# Altium PCB FocPCB.PcbDoc
Units mil, origin at the board's own origin, x right, y up, seen from the top; angles counter-clockwise.
Board outline 2210.03 x 1105.03 mil, 2 copper layers (Component Side, Bottom Layer), stack 12.8 mil thick; 86 components, 70 nets, 336 pads, 121 vias.
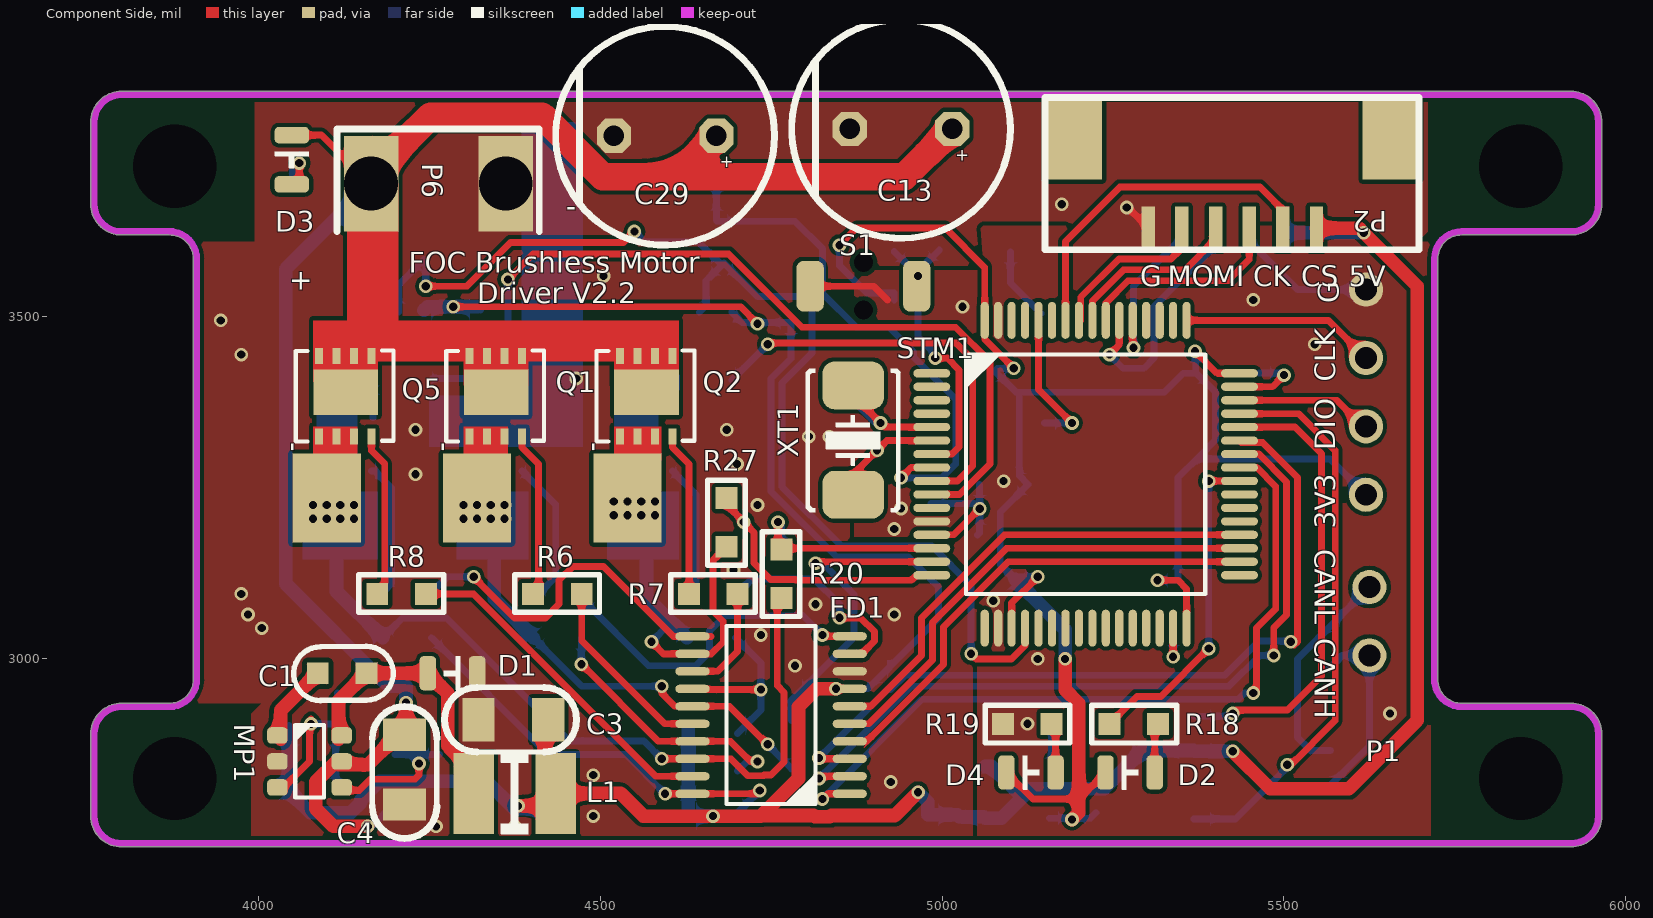
[diagram p0: Component Side view]
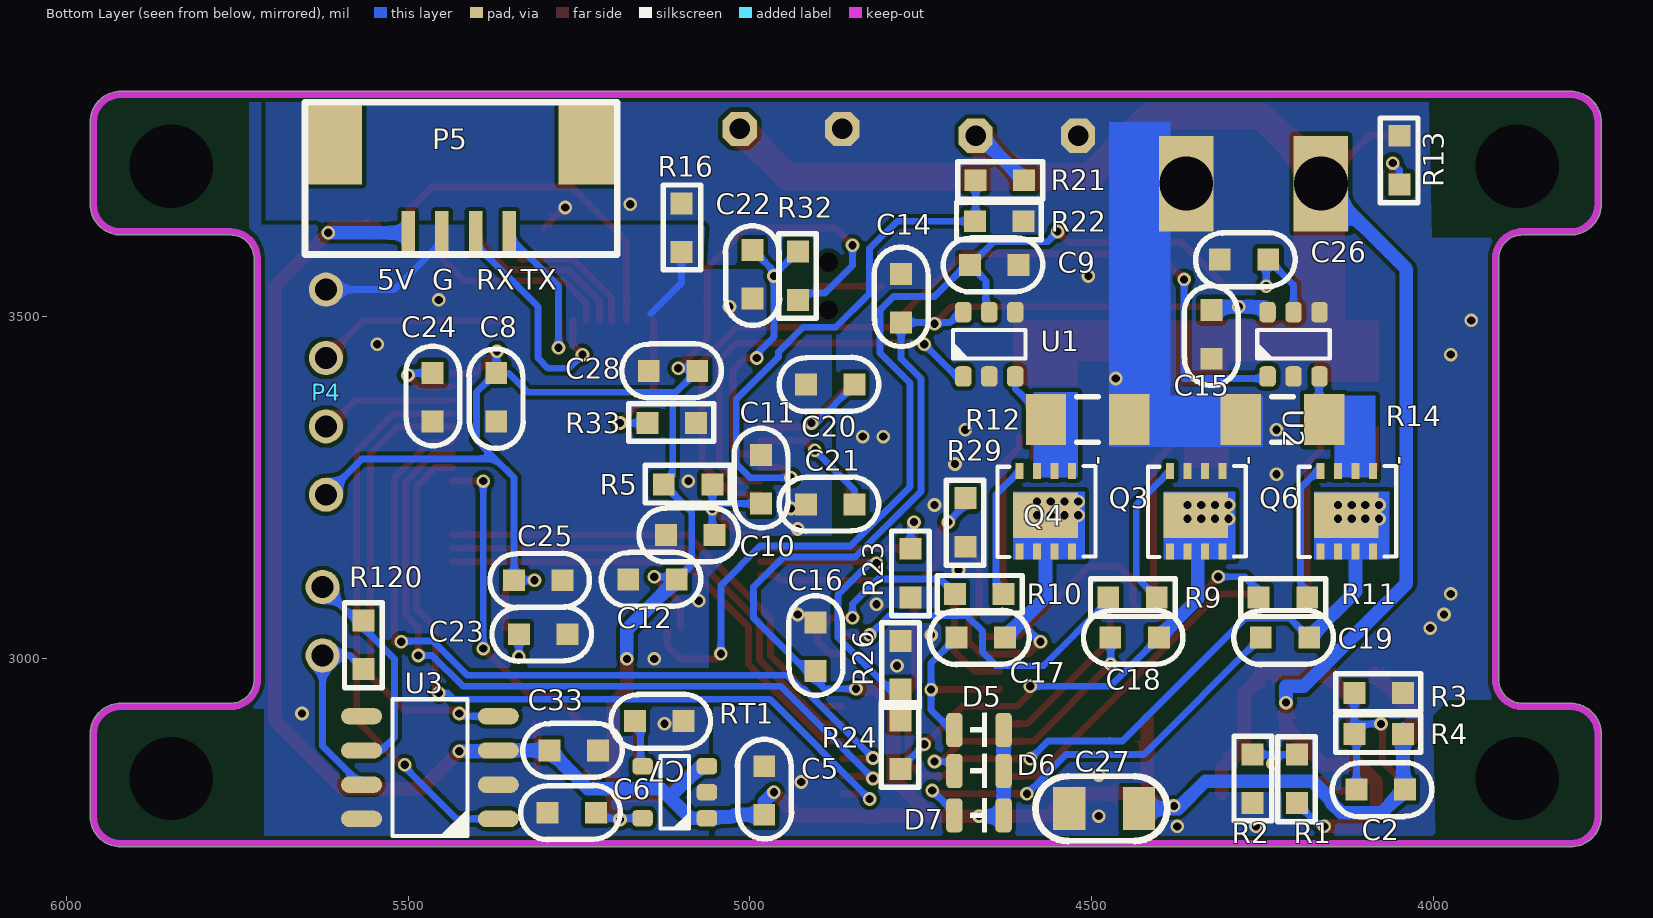
[diagram p1: Bottom Layer view, seen from below]
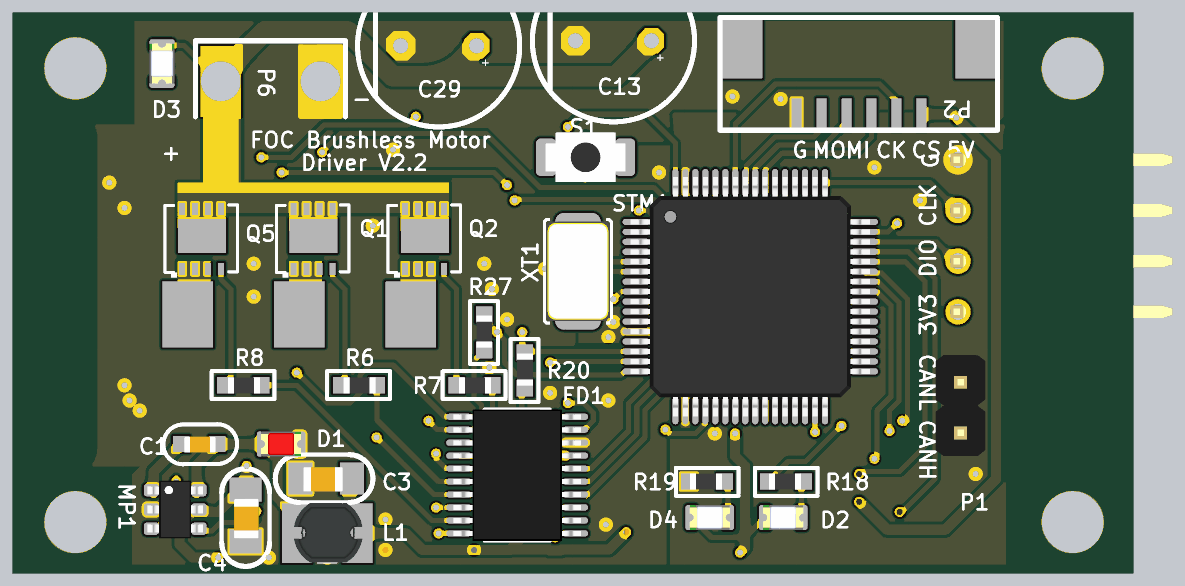
[diagram p2: 3D render of the assembled board from above, using the file's embedded part models]
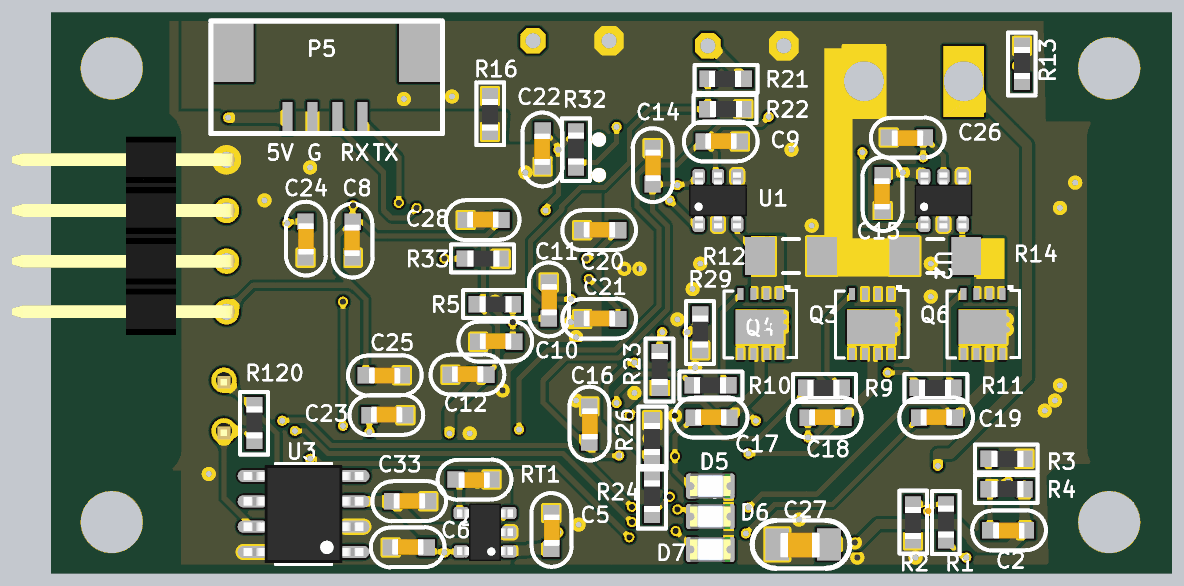
[diagram p3: 3D render of the assembled board from below, using the file's embedded part models]

## Layer stack, top to bottom
Top Solder: solder mask 0.4, Solder Resist, Dk 3.5
Component Side: signal copper 1.4
Dielectric 1: core 10, FR-4, Dk 4.2
Bottom Layer: signal copper 1.4
Solder Side: solder mask 0.4, Solder Resist, Dk 3.5

## Board outline
3799.97,2724.99 ccw(c3800,2770) 3800,2724.99 3800,2724.98 5710,2724.98 ccw(c5710,2730) 5710.03,2724.99 5920,2724.99 ccw(c5920,2770) 5965.02,2770 5965.02,2890 ccw(c5920,2890) 5920,2935.01 5760,2935.01 cw(c5760,2970) 5725.02,2970 5725.02,3585 cw(c5760,3585) 5760,3619.99 5920,3619.99 ccw(c5920,3665) 5965.02,3665 5965.02,3785 ccw(c5920,3785) 5920,3830.01 3800,3830.01 ccw(c3800,3785) 3754.99,3785 3754.99,3665 ccw(c3800,3665) 3800,3619.99 3870,3619.99 cw(c3870,3585) 3904.99,3585 3904.99,2970 cw(c3870,2970) 3870,2935.01 3800,2935.01 ccw(c3800,2890) 3754.99,2890 3754.99,2770 ccw(c3800,2770)

## Design rules (kind name [scope] priority, off if disabled: settings)
Clearance [All] p1: gap=6 ignorepadtopadclearanceinfootprint=FALSE
PlaneConnect [All] p1: planeconnectstyle=Direct reliefexpansion=20 reliefentries=4 reliefconductorwidth=10 reliefairgap=10
PolygonConnect [All] p1: connectstyle=Direct reliefconductorwidth=10 reliefentries=4 polygonreliefangle="90 Angle" airgapwidth=10
RoutingVias [All] p1: holewidth=28 width=50 viastyle="Through Hole" minholewidth=28 minwidth=50 maxholewidth=28 maxwidth=50
SolderMaskExpansion [All] p1: expansion=4
Width [All] p1: maxlimit=100 minlimit=10 preferedwidth=10 minimp=50.000000 maximp=50.000000 favimp=50.000000
29 further rules are at their usual default settings.

## Classes and differential pairs
component class Power: C1 C2 C3 C4 C5 C6 C7 C8 C12 C13 C25 C27 C28 C29 D1 D3 L1 MP1 P6 R1 R2 R3 R4 R13 R16 R21 R22 RT1
component class H_Bridge: C9 C14 C15 C16 C17 C18 C19 C26 D5 D6 D7 FD1 Q1 Q2 Q3 Q4 Q5 Q6 R6 R7 R8 R9 R10 R11 R12 R14 R20 R23 R24 R26 R27 R29 U1 U2
component class MCU: C10 C11 C20 C21 C22 C23 C24 C33 D2 D4 P1 P2 P4 P5 R5 R18 R19 R32 R33 R120 S1 STM1 U3 XT1

## Components (designator, comment, footprint, x,y, rotation, side; value= is the part's Value field where it differs from the comment)
C1 "Cap_0603" CAP_0603 4125,2980 r180 top value=0.1u
C2 "Cap_0603" CAP_0603 4075,2810 r0 bottom value=33pF
C3 "Cap_0805" CAP_0805 4370,2910 r0 top value=10u
C4 "Cap_0805" CAP_0805 4215,2835 r90 top value=10u
C5 "Cap_0603" CAP_0603 4980,2810 r270 bottom value=1u
C6 "Cap_0603" CAP_0603 5263,2774 r180 bottom value=0.1u
C7 "Cap_0603" CAP_0603 5130,2910 r0 bottom value=22n
C8 "Cap_0603" CAP_0603 5370,3380 r90 bottom value=0.1u
C9 "Cap_0603" CAP_0603 4645,3575 r180 bottom value=0.1u
C10 "Cap_0603" CAP_0603 5090,3180 r180 bottom value=0.1u
C11 "Cap_0603" CAP_0603 4985,3265 r270 bottom value=0.1u
C12 "Cap_0603" CAP_0603 5145,3115 r180 bottom value=0.1u
C13 "*μF" CAP-ELE-PIN150/DIA320 5015,3775 r180 top
C14 "Cap_0603" CAP_0603 4780,3530 r270 bottom value=0.1u
C15 "Cap_0603" CAP_0603 4324,3472 r90 bottom value=0.1u
C16 "Cap_0603" CAP_0603 4905,3020 r270 bottom value=0.1u
C17 "Cap_0603" CAP_0603 4665,3030 r180 bottom value=1u
C18 "Cap_0603" CAP_0603 4440,3030 r180 bottom value=1u
C19 "Cap_0603" CAP_0603 4220,3030 r180 bottom value=1u
C20 "Cap_0603" CAP_0603 4885,3400 r180 bottom value=20pf
C21 "Cap_0603" CAP_0603 4885,3225 r180 bottom value=20pf
C22 "Cap_0603" CAP_0603 4995,3560 r90 bottom value=0.1u
C23 "Cap_0603" CAP_0603 5305,3035 r180 bottom value=0.1u
C24 "Cap_0603" CAP_0603 5465,3385 r270 bottom value=0.1u
C25 "Cap_0603" CAP_0603 5307,3116 r0 bottom value=0.1u
C26 "Cap_0603" CAP_0603 4275,3585 r0 bottom value=0.1u
C27 "Cap_0805" CAP_0805 4485,2780 r180 bottom value=10u
C28 "Cap_0603" CAP_0603 5115,3420 r180 bottom value=0.1u
C29 "*μF" CAP-ELE-PIN150/DIA320 4670,3765 r180 top
C33 "Cap_0603" CAP_0603 5260,2865 r180 bottom value=0.1u
D1 "Diode" LED_0805_RED 4283.5,2979.5 r0 top
D2 "D_0805" LED_0805_YELLOW 5275,2835 r180 top
D3 "D_0805" LED_0805_YELLOW 4050,3730 r90 top
D4 "D_0805" LED_0805_YELLOW 5130,2835 r180 top
D5 "D_0805" LED_0805_YELLOW 4665,2895 r180 bottom
D6 "D_0805" LED_0805_YELLOW 4665,2835 r180 bottom
D7 "D_0805" LED_0805_YELLOW 4665,2770 r180 bottom
FD1 "FD6288" TSSOP_E170_P0.65_20 4750,2917.8 r180 top
L1 "Ind_CD32" IND_CD52 4375,2810 r0 top value=10uH
MP1 "MP2451" SOT23-6 4075,2850 r180 top
P1 "HDR1x2_2.54" HDR1X2_2.54_180 5625,3005 r180 top
P2 "HDR1x6_2.54" 1.25mm_1X6_SMT 5398.43,3625 r0 top
P4 "HDR1x4_2.54" HDR1X4_2.54_90 5620,3240 r0 bottom
P5 "HDR1x4_2.54" 1.25X4_SMT 5390,3690 r180 bottom
P6 "Header 2" power 4165,3695 r0 top
Q1 "DFN_MOS" DFN3X3X8 4411.82,3411 r90 top
Q2 "DFN_MOS" DFN3X3X8 4631.82,3411 r90 top
Q3 "DFN_MOS" DFN3X3X8 4411.82,3189 r270 bottom
Q4 "DFN_MOS" DFN3X3X8 4631.82,3189 r270 bottom
Q5 "DFN_MOS" DFN3X3X8 4191.82,3411 r90 top
Q6 "DFN_MOS" DFN3X3X8 4191.82,3189 r270 bottom
R1 "Res_0603" RES_0603 4282,2826 r90 bottom value=20K
R2 "Res_0603" RES_0603 4183,2823 r270 bottom value=10K
R3 "Res_0603" RES_0603 4079,3032 r180 bottom value=56K
R4 "Res_0603" RES_0603 4079,2972 r180 bottom value=300K
R5 "Res_0603" RES_0603 5089,3337 r180 bottom value=0R
R6 "Res_0603" RES_0603 4439,3177 r0 top value=10R
R7 "Res_0603" RES_0603 4667,3177 r0 top value=10R
R8 "Res_0603" RES_0603 4211,3177 r0 top value=10R
R9 "Res_0603" RES_0603 4442,3008 r0 bottom value=10R
R10 "Res_0603" RES_0603 4666,3013 r0 bottom value=10R
R11 "Res_0603" RES_0603 4222,3008 r0 bottom value=10R
R12 "Res1" RES-1206 4445,3350 r0 bottom value=0.003R
R13 "Res_0603" RES_0603 4132,3731 r90 bottom value=10K
R14 "Res1" RES-1206 4282.05,3350 r180 bottom value=0.003R
R16 "Res_0603" RES_0603 5018,3629 r270 bottom value=0R
R18 "Res_0603" RES_0603 5279,2823 r180 top value=10K
R19 "Res_0603" RES_0603 5123,2823 r180 top value=10K
R20 "Res_0603" RES_0603 4683,3126 r90 top value=100K
R21 "Res_0603" RES_0603 4636,3618 r0 bottom value=100K
R22 "Res_0603" RES_0603 4634,3722 r180 bottom value=10K
R23 "Res_0603" RES_0603 4847,3127 r90 bottom value=10K
R24 "Res_0603" RES_0603 4862,2876 r90 bottom value=100K
R26 "Res_0603" RES_0603 4698,2989 r270 bottom value=10K
R27 "Res_0603" RES_0603 4603,3201 r90 top value=100K
R29 "Res_0603" RES_0603 4767,3201 r90 bottom value=10K
R32 "Res_0603" RES_0603 5012,3562 r90 bottom value=10K
R33 "Res_0603" RES_0603 5113,3427 r180 bottom value=10K
R120 "Res_0603" RES_0603 5647,3022 r90 bottom value=120R
RT1 "RT9193" SOT23-5 5110,2805 r180 bottom
S1 "ButtonTACT_3x4x2_180" ButtonTACT_3x4x2_180H 4885,3545 r180 top
STM1 "STM32F4" LQFP_P0.5_64 5210,3270 r0 top
U1 "INA181" SOT23-6 4650,3460 r270 bottom
U2 "INA181" SOT23-6 4205,3460 r270 bottom
U3 "TJA1050" SOP_E150_8 5470,2845 r90 bottom
XT1 "XTAL_5032_2P" XT_5032_2 4870,3320 r90 top value=8M

## Footprints (in the part's own frame and the unit in brackets; to place one, negate y for a bottom-side part, rotate by r counter-clockwise, add the part's x,y. Pads: shape width x height; smd on the part's side, far side on the other; paste and mask are expansions set on the pad)
1.25mm_1X6_SMT [mm]
  rect 2.1x3 smd: 0(-5.225,3.425) 0(6.55,3.425)
  rect 0.5x1.6 smd: 1(-2.46,0.127) 2(-1.21,0.127) 3(0.04,0.127) 4(1.29,0.127) 5(2.54,0.127) 6(3.79,0.127)
  silkscreen extent -6.3,-0.67 7.6,4.97
1.25X4_SMT [mm]
  rect 2.1x3 smd: 0(-5.55,1.6) 0(3.85,1.6)
  rect 0.5x1.6 smd: 1(-2.785,-1.698) 2(-1.535,-1.698) 3(-0.285,-1.698) 4(0.965,-1.698)
  silkscreen extent -6.62,-2.5 4.97,3.15
ButtonTACT_3x4x2_180H [mil]
  round 0 hole 28: 0(0,35) 0(0,-35)
  rrect50% 40x74 smd: 1(-78,0) 2(78,0)
  body extent -79,-49 79,49, height 63
CAP-ELE-PIN150/DIA320 [mil]
  oct 50x50 hole 30: 1(0,0) 2(150,0)
  silkscreen extent -85,-160 235,160
CAP_0603 [mil]
  rect 32x32 smd: 1(-33,1) 2(38,1)
  silkscreen extent -72,-38 73,41, body extent -30,-14 33,18, height 31
CAP_0805 [mil]
  rect 47.24x62.99 smd: 1(-48,1) 2(54,1)
  silkscreen extent -98,-46 95,48, body extent -42,-25 36,24, height 39
DFN3X3X8 [mm]
  rect 0.6x0.3 smd: 1(-2.184,2.616) 2(-2.184,1.966) 3(-2.184,1.316) 4(-2.184,0.666) 5(0.816,0.666) 6(0.816,1.316) 7(0.816,1.966) 8(0.816,2.616)
  rect 1.7x2.4 smd: 5(-0.533,1.626)
  silkscreen extent -2.36,-0.15 1.02,3.48
HDR1X2_2.54_180 [mil]
  round 50 hole 32: 1(0,0) 2(0,-100)
  body extent -49,-150 49,50, height 323
HDR1X4_2.54_90 [mil]
  round 50 hole 32: 1(0,0) 2(0,-100) 3(0,-200) 4(0,-300)
  body extent -15,-346 424,46, height 99
IND_CD52 [mil]
  rect 59.06x118.11 smd: 1(-60,-7) 2(60,-7)
  silkscreen extent -20,-66 20,54, body extent -66,-65 70,53, height 83
LED_0805_RED [mil]
  rrect50% 24x50 smd: 1(36.5,-0.5) 2(-35.5,-0.5)
  silkscreen extent -12,-25 12,24, body extent -39,-25 40,24, height 43
LED_0805_YELLOW [mil]
  rrect50% 24x50 smd: 1(36,1) 2(-36,1)
  silkscreen extent -12,-24 12,26, body extent -40,-24 40,26, height 43
LQFP_P0.5_64 [mil]
  oval 54x12 smd: 1(-225,147.64) 2(-225,127.95) 3(-225,108.27) 4(-225,88.58) 5(-225,68.9) 6(-225,49.21) 7(-225,29.53) 8(-225,9.84) 9(-225,-9.84) 10(-225,-29.53) 11(-225,-49.21) 12(-225,-68.9) 13(-225,-88.58) 14(-225,-108.27) 15(-225,-127.95) 16(-225,-147.64) 33(225,-147.64) 34(225,-127.95) 35(225,-108.27) 36(225,-88.58) 37(225,-68.9) 38(225,-49.21) 39(225,-29.53) 40(225,-9.84) 41(225,9.84) 42(225,29.53) 43(225,49.21) 44(225,68.9) 45(225,88.58) 46(225,108.27) 47(225,127.95) 48(225,147.64)
  oval 12x54 smd: 17(-147.64,-225) 18(-127.95,-225) 19(-108.27,-225) 20(-88.58,-225) 21(-68.9,-225) 22(-49.21,-225) 23(-29.53,-225) 24(-9.84,-225) 25(9.84,-225) 26(29.53,-225) 27(49.21,-225) 28(68.9,-225) 29(88.58,-225) 30(108.27,-225) 31(127.95,-225) 32(147.64,-225) 49(147.64,225) 50(127.95,225) 51(108.27,225) 52(88.58,225) 53(68.9,225) 54(49.21,225) 55(29.53,225) 56(9.84,225) 57(-9.84,225) 58(-29.53,225) 59(-49.21,225) 60(-68.9,225) 61(-88.58,225) 62(-108.27,225) 63(-127.95,225) 64(-147.64,225)
  silkscreen extent -175,-175 175,175, body extent -236,-236 236,236, height 59
power [mil]
  rect 80x140 hole 78.74: 1(0,0) 2(196.85,0)
  silkscreen extent -50,-70 246,80
RES-1206 [mm]
  rect 1.5x1.9 smd: 1(0,0) 2(3.1,0)
  silkscreen extent 1.15,-0.85 1.95,0.85, body extent -0.13,-0.87 3.22,0.87, height 0.71
RES_0603 [mil]
  rect 32x32 smd: 1(-37,-82) 2(34,-82)
  silkscreen extent -64,-109 60,-54, body extent -31,-98 31,-66, height 18
SOP_E150_8 [mil]
  oval 24x60 smd: 1(-79,-102) 2(-29,-102) 3(21,-102) 4(71,-102) 5(71,98) 6(21,98) 7(-29,98) 8(-79,98)
  silkscreen extent -104,-57 96,53, body extent -100,-120 92,116, height 69
SOT23-5 [mil]
  rrect50% 30x24 smd: 1(47,-38) 2(47,0) 3(47,38) 4(-47,38) 5(-47,-38)
  silkscreen extent -21,-53 21,53, body extent -55,-57 55,57, height 57
SOT23-6 [mil]
  rrect50% 30x24 smd: 1(47,-38) 2(47,0) 3(47,38) 4(-47,38) 5(-47,0) 6(-47,-38)
  silkscreen extent -21,-53 21,53, body extent -55,-57 55,57, height 57
TSSOP_E170_P0.65_20 [mil]
  oval 50x12 smd: 1(-115,115.16) 2(-115,89.57) 3(-115,63.98) 4(-115,38.39) 5(-115,12.8) 6(-115,-12.8) 7(-115,-38.39) 8(-115,-63.98) 9(-115,-89.57) 10(-115,-115.16) 11(115,-115.16) 12(115,-89.57) 13(115,-63.98) 14(115,-38.39) 15(115,-12.8) 16(115,12.8) 17(115,38.39) 18(115,63.98) 19(115,89.57) 20(115,115.16)
  silkscreen extent -65,-130 65,130, body extent -126,-130 126,130, height 42
XT_5032_2 [mil]
  rrect50% 70x90 smd: 1(-80,0) 2(80,0)
  silkscreen extent -104,-68 104,68, body extent -98,-63 98,63, height 39

## Part data
C1 C2 C3 C4 C5 C6 C7 C8 C9 C10 C11 C12 C14 C15 C16 C17 C18 C19 C20 C21 C22 C23 C24 C25 C26 C27 C28 C33: "Capacitor"
C13 C29: library part CAP-ELE, "电解电容", LatestRevisionDate=17-Jul-2002, LatestRevisionNote="Re-released for DXP Platform.", PackageDescription="Polarized Capacitor (Radial); 2 Leads", PackageReference=RB7.6-15, Published=8-Jun-2000, Publisher="Altium Limited"
L1: "Inductor"
P1 P4 P5: "Header"
P2: library part HDR1x6_2.54T, "Header"
P6: "Header, 2-Pin", LatestRevisionDate=17-Jul-2002, LatestRevisionNote="Re-released for DXP Platform.", Publisher="Altium Limited"
R1 R2 R3 R4 R5 R6 R7 R8 R9 R10 R11 R12 R13 R14 R16 R18 R19 R20 R21 R22 R23 R24 R26 R27 R29 R32 R33 R120: "Resistor"
  R12 R14: LatestRevisionDate=17-Jul-2002, LatestRevisionNote="Re-released for DXP Platform.", PackageReference=AXIAL-0.3, Published=8-Jun-2000, Publisher="Altium Limited"
RT1: "Power"
S1: "Button"
STM1: library part STM32F405R, "MCU"
XT1: "Crystal Oscillator"

## Free pads (board coordinates)
  round 30 hole 122.05: 3(3877.95,2825) 3(3877.95,3720.63) 3(5846.46,2825) 3(5846.46,3720.63)
  rect 100x130 smd: 4(4099.91,3235) 4(4319.91,3235) 4(4539.91,3235)

## Via types
v1: diameter 20, hole 12, Component Side to Bottom Layer, 121 vias

## Nets (pads, with @x,y where several pads share a name; then routed paths per layer and width w, separated by ;. In a path a pad name is that pad's centre, name@x,y a point inside that pad or via, vN(x,y) a via of type N, cw(c..) or ccw(c..) an arc to the next point about the centre after c; other vN are vias at no path point)
3V3: C6.2 C8.2 C12.2 C25.2 C28.2 D2.1 D4.1 P4.1 R5.1 R32.1 RT1.5 STM1.19 STM1.32 STM1.48 STM1.64 | length 2818.1
  Component Side w10: v1(4850,3605) 4875,3630 5005,3630 5062.36,3572.64 STM1.64 5062.36,3467.64 v1(5105,3425) ; D4.1 5133,2795 5200,2795 D2.1 ; STM1.19 5101.73,3081.73 v1(5140,3120) ; v1(5315,3115) 5345,3115 5357.64,3102.36 STM1.32 ; v1(5370,3450) 5402.36,3417.64 STM1.48
  Component Side w20: v1(5180,3000) 5180,2955 5200,2935 5200,2795 5200,2775 v1(5190,2765)
  Bottom Layer w10: v1(4850,3605) 4850,3575 4890,3535 4930,3535 R32.1 ; v1(5105,3425) 5081,3425 C28.2 5108,3390 5325,3390 5352.64,3417.64 5372.36,3417.64 5400,3390 5400,3320 5372.5,3292.5 ; 5113,3385 5113,3268 R5.1 5085,3214 5085,3138 C12.2 5111,3120 v1(5140,3120) ; RT1.5 5217,2767 C6.2 ; v1(5315,3115) C25.2 5345,3265 5372.5,3292.5 ; v1(5370,3450) 5371,3449 C8.2 ; P4.1 5567.5,3292.5 5372.5,3292.5
  Bottom Layer w20: C12.2 5180,3043 v1(5180,3000)
5V: C2.1 C3.2 C5.2 C14.2 C15.2 C16.2 C27.2 C33.1 D5.1 D6.1 D7.1 FD1.7 L1.2 P2.6 P5.1 R4.2 RT1.1 RT1.3 U1.6 U2.6 U3.3 | length 4979.8
  Component Side w10: v1(4285,3515) 4705,3515 v1(4730,3490) ; v1(4845,2956.18) FD1.7
  Component Side w20: v1(4380,2785) 4417,2785 L1.2 4530.23,2803 4563.23,2770 v1(4665,2770) 4735,2770 4736,2771 ; L1.2@4419,2819 C3.2@4419,2911 ; v1(4845,2956.18) 4816.18,2956.18 4790,2930 4790,2825 4736,2771 ; v1(4965,2805) 4931,2771 4837.77,2771 4835.77,2769 4814.23,2769 4812.23,2771 4736,2771 ; v1(5425,2865) 5480,2810 5595,2810 5695,2910 5695,3545 v1(5616.85,3623.15) 5610,3630 P2.6
  Bottom Layer w10: R4.2 R4.2@4045,2902.44 ; C15.2@4320,3515 C15.2 ; U1.6@4692.4,3507.32 4707.72,3492 C14.2 4779,3439 4750,3410 4750,3245 4846,3149 4951,3149 4995,3105 4995,3060 4891.18,2956.18 v1(4845,2956.18)
  Bottom Layer w20: C2.1 4076,2775 4135,2775 4150,2790 4150,2793.63 4177.37,2821 4222.63,2821 4242.37,2821 4334,2821 4374,2781 C27.2 ; C2.1@4045,2812 R4.2 ; U2.6@4242.4,3510 4247.4,3515 v1(4285,3515) C15.2@4320,3515 ; D5.1 D6.1 D7.1 4630,2770 v1(4665,2770) ; v1(4965,2805) 4979,2791 C5.2 5022,2772 5025,2769 5061,2769 RT1.1 5087,2767 5117.5,2797.5 ; RT1.3 5072,2843 5117.5,2797.5 ; v1(5425,2865) 5369,2865 U3.3 C33.1 5237,2810 5130,2810 5117.5,2797.5 ; P5.1 v1(5616.85,3623.15)
A: C19.2 FD1.18 pad.4@4099.91,3235 Q5.1 Q5.2 Q5.3 Q6.5 Q6.6 Q6.7 Q6.8 R20.1 | length 1113.4
  Component Side w10: v1(4590,2853.82) FD1.18 4691.18,2853.82 4716,2829 4738.7,2829 4739.7,2830 4750,2830 4769,2849 4769,2951 4759,2961 4759,3089 R20.1 R20.1@4770,3089
  Bottom Layer w10: C19.2 4211,3060 4275,3060 4455,2880 4475,2880 ; 4474,2881 4475,2880 ; v1(4590,2853.82) 4563.82,2880 4475,2880
  Bottom Layer w20: Q6.7 4114.41,3098.59 C19.2
  other v1: 4080,3205 4100,3205 4120,3205 4140,3205 4080,3225 4100,3225 4120,3225 4140,3225
AD_Current1: STM1.10 U2.1 | length 1294.1
  Component Side w10: v1(4365,3555) 4402,3592 4688,3592 4795,3485 5020,3485 5070,3435 5070,3285 5025.47,3240.47 STM1.10
  Bottom Layer w10: U2.1@4254.72,3410 4365,3410 v1(4365,3555)
AD_Current2: STM1.9 U1.1 | length 609.5
  Component Side w10: v1(4745,3460) 4747,3462 5020.37,3462 5045,3437.37 5045,3282.63 5022.53,3260.16 STM1.9
  Bottom Layer w10: U1.1@4692.4,3407.4 v1(4745,3460)
AH: FD1.19 R8.2 | length 500.5
  Component Side w10: R8.2 4315,3095 4581.77,2828.23 FD1.19
AL: FD1.11 R11.2 | length 533
  Component Side w10: v1(4315,3120) 4375,3060 4420,3060 4440,3080 4440,3115 4460,3135 4505,3135 4607.05,3032.95 FD1.11 4662.05,3032.95
  Bottom Layer w10: R11.2@4256,3100 4276,3120 v1(4315,3120)
B: C18.2 FD1.15 pad.4@4319.91,3235 Q1.1 Q1.2 Q1.3 Q3.5 Q3.6 Q3.7 Q3.8 R24.1 | length 667.8
  Component Side w10: v1(4590,2960) 4590,2950 4609.41,2930.59 FD1.15 4689.41,2930.59 v1(4745,2875)
  Bottom Layer w10: C18.2 4473,2960 v1(4590,2960) ; v1(4745,2875) 4780,2840 R24.1
  Bottom Layer w20: Q3.5@4347.82,3210 4345,3207.18 4345,3088 C18.2
  other v1: 4300,3205 4320,3205 4340,3205 4360,3205 4300,3225 4320,3225 4340,3225 4360,3225
BH: FD1.16 R6.2 | length 280.5
  Component Side w10: R6.2 4473,3027 4595,2905 FD1.16
BL: FD1.10 R9.2 | length 494.9
  Component Side w10: v1(4825,3035) 4827.05,3032.95 FD1.10
  Bottom Layer w10: R9.2 4476,3084.3 4570.3,2990 4640,2990 4660,3010 4660,3040.56 4682.44,3063 4785.56,3063 4786.28,3063.72 4796.28,3063.72 v1(4825,3035)
C: C17.2 FD1.12 pad.4@4539.91,3235 Q2.1 Q2.2 Q2.3 Q4.5 Q4.6 Q4.7 Q4.8 R27.1 | length 520
  Component Side w10: v1(4575,3025) 4592.64,3007.36 FD1.12 4662.36,3007.36 4680,3025 4680,3055 4665,3070 4665,3144 R27.1
  Bottom Layer w10: v1(4575,3025) 4600,3050 4600,3058
  Bottom Layer w20: Q4.5@4567.82,3210 4567.82,3090.18 4600,3058 C17.2
  other v1: 4520,3210 4540,3210 4560,3210 4580,3210 4520,3230 4540,3230 4560,3230 4580,3230
CAN_H: P1.1 R120.1 U3.7 | length 281.2
  Bottom Layer w10: R120.1 5585,3005 P1.1 5625,2872.47 5568.53,2816 U3.7
CAN_L: P1.2 R120.2 U3.6 | length 319.4
  Bottom Layer w10: U3.6 5539,2866 5520,2885 5520,3000 P1.2
CAN_RX: STM1.44 U3.4 | length 672.6
  Component Side w10: v1(5425,2920) 5430,2925 5505,2925 5555,2975 5555,3300 5516.1,3338.9 STM1.44
  Bottom Layer w10: U3.4 5421,2916 v1(5425,2920)
CAN_TX: STM1.45 U3.1 | length 825.6
  Component Side w10: STM1.45 5521.42,3358.58 5575,3305 5575,2910 5510,2845 v1(5505,2845)
  Bottom Layer w10: U3.1 5429,2766 5505,2842 v1(5505,2845)
CH: FD1.13 R7.2 | length 162.1
  Component Side w10: FD1.13 4671.77,2981.77 4701,3011 R7.2
CH1: FD1.1 STM1.41 | length 1117.7
  Component Side w10: v1(4825,2795) 4832.64,2802.64 FD1.1 ; STM1.41 5460.36,3279.84 5488,3252.2 5488,3073 5460,3045 5460,2955 v1(5455,2950)
  Bottom Layer w10: v1(4825,2795) 4971,2941 5433.7,2941 5442.65,2949.95 v1(5455,2950)
CH1_L: FD1.4 STM1.34 | length 711
  Component Side w10: FD1.4 4889.66,2879.41 5002,2991.75 5002,3046.75 5097.3,3142.05 STM1.34
CH2: FD1.2 STM1.42 | length 1133.5
  Component Side w10: v1(4820,2825) 4823.23,2828.23 FD1.2 ; STM1.42 5463.3,3299.53 5504,3258.83 5504,3064 5485,3045 v1(5485,3005)
  Bottom Layer w10: v1(4820,2825) 4955,2960 5420,2960 5465,3005 v1(5485,3005)
CH2_L: FD1.5 STM1.35 | length 708.6
  Component Side w10: FD1.5 4892.63,2905 4986,2998.37 4986,3053.37 5094.36,3161.73 STM1.35
CH3: FD1.3 STM1.43 | length 1168.6
  Component Side w10: v1(4820,2855) 4821.18,2853.82 FD1.3 ; STM1.43 5437.69,3316.53 5468.93,3316.53 5520,3265.45 5520,3025 5515,3020 v1(5510,3025)
  Bottom Layer w10: v1(4820,2855) 4920,2955 4924.56,2955 4945.56,2976 5413.37,2976 5463.37,3026 5509,3026 v1(5510,3025)
CH3_L: FD1.6 STM1.36 | length 706.1
  Component Side w10: FD1.6 4895.59,2930.59 4970,3005 4970,3060 5091.42,3181.42 STM1.36
CL: FD1.9 R10.2 | length 316.5
  Component Side w10: v1@4850,3065 v1(4850,3060) 4880.99,3060 4901,3039.99 4901,3025.91 4882.45,3007.36 FD1.9
  Bottom Layer w10: R10.2 4722,3117 4813,3117 4850,3080 v1(4850,3060)
ENCODER_CSN: P2.5 STM1.58 | length 506.8
  Component Side w10: STM1.58 5180.47,3610.47 5260,3690 5465,3690 5498.43,3656.57 P2.5
ENCODER_MISO: P2.3 STM1.56 | length 262
  Component Side w10: STM1.56 5219.84,3523.3 5265.54,3569 5355,3569 5400,3614 P2.3
ENCODER_MOSI: P2.2 STM1.57 | length 243.5
  Component Side w10: STM1.57 5202.84,3495 5202.84,3528.93 5258.92,3585 5335,3585 5350.79,3600.79 P2.2
ENCODER_SCLK: P2.4 STM1.55 | length 307.3
  Component Side w10: STM1.55 5239.53,3520.36 5272.17,3553 5418,3553 5449.21,3584.21 P2.4
GND: C6.1 C7.1 C8.1 C10.1 C11.1 C12.1 C20.1 C21.1 C22.1 C23.2 C24.2 C25.1 C28.1 C33.2 P4.4 P5.2 R16.2 R19.2 R33.2 S1.2 STM1.12 STM1.18 STM1.63 U3.2 U3.8 | length 447.9
  Component Side w10: S1.2 4900,3545 4920,3525
  Bottom Layer w10: C20.1@4908,3401 C20.1@4908,3412 ; R16.2 5100,3550 5145,3505 ; P5.2 5450.43,3609.57 5520,3540 P4.4@5615,3540
  other v1: 5125,2905 5655,2920 5140,3000 5075,3085 4930,3190 4940,3220 5090,3260 5545,3460 5030,3515 5455,3525
INA: R20.2 R23.2 STM1.14 | length 304.5
  Component Side w10: v1(4760,3200) 4760,3165 R20.2 ; R20.2@4765,3165 4768.27,3161.73 STM1.14
  Bottom Layer w10: v1(4760,3200) 4765,3195 R23.2
INB: R24.2 R26.2 STM1.15 | length 467.6
  Component Side w10: v1(4815,3140) 4817.05,3142.05 STM1.15
  Bottom Layer w10: R24.2 4780,2940 4871,3031 4871,3094 4825,3140 v1(4815,3140)
INC: R27.2 R29.2 STM1.16 | length 430.3
  Component Side w10: R27.2 4685,3225 v1(4710,3200) 4725,3185 4725,3140 4749,3116 4785.56,3116 4786.56,3115 4955,3115 4962.36,3122.36 STM1.16
  Bottom Layer w10: R29.2 4685,3225 v1(4710,3200)
LED: R18.2 STM1.40 | length 480.6
  Component Side w10: R18.2 5285,2945 5320,2945 v1(5390,3015) ; v1(5390,3260) 5390.16,3260.16 STM1.40
  Bottom Layer w10: v1(5390,3015) v1(5390,3260)
NetC1_1: C1.1 D1.2 L1.1 MP1.6 | length 405.1
  Component Side w20: MP1.6@4117.32,2882.4 4117.32,2938.32 C1.1 D1.2 4277,2950 4277,2873 4310,2840 L1.1@4310,2803
NetC1_2: C1.2 MP1.1 | length 119.1
  Component Side w20: MP1.1@4032.68,2882.4 4032.68,2924.68 C1.2
NetC2_2: C2.2 MP1.3 R3.1 R4.1 | length 305.9
  Component Side w10: MP1.3@4032.68,2807.6 4075,2849.92 4075,2910 4077,2912 4077.13,2911.87 v1(4077.13,2904.87)
  Bottom Layer w10: v1(4077.13,2904.87) R4.1@4110.87,2904.87 ; C2.2 4113,2887 R4.1 R3.1
NetC7_2: C7.2 RT1.4 | length 69.3
  Bottom Layer w10: RT1.4@5160,2843 5160,2901 C7.2
NetC10_2: C10.2 C11.2 R5.2 STM1.13 | length 235.1
  Component Side w10: STM1.13 5016.92,3181.42 v1(5055,3219.5)
  Bottom Layer w10: C11.2 5047.5,3227 v1(5055,3219.5) ; C10.2 5055,3184 v1(5055,3219.5) ; R5.2 v1(5055,3219.5)
NetC17_1: C17.1 D5.2 FD1.14 | length 269.9
  Component Side w10: FD1.14 4636.18,2955 v1(4735,2955)
  Bottom Layer w10: C17.1 4735,2994 v1(4735,2955) 4735,2925 D5.2@4701,2891
NetC18_1: C18.1 D6.2 FD1.17 | length 390.2
  Component Side w10: v1(4472.5,2992.25) 4585.34,2879.41 FD1.17 4690.59,2879.41 4720,2850 v1(4730,2850)
  Bottom Layer w10: v1(4472.5,2992.25) 4472.5,3030.5 C18.1 ; D6.2 4715,2850 v1(4730,2850)
NetC19_1: C19.1 D7.2 FD1.20 | length 628.9
  Component Side w10: v1(4595,2802.64) FD1.20 4728.64,2802.64 v1(4733.43,2807.43)
  Bottom Layer w10: C19.1 4424,2860 4537.64,2860 v1(4595,2802.64) v1@4595,2804.7 ; D7.2 4701,2775 v1(4733.43,2807.43)
NetC23_1: C23.1 STM1.31 | length 75.1
  Component Side w10: v1(5337.95,3002.95) STM1.31
  Bottom Layer w10: v1(5337.95,3002.95) v1(5337.95,3002.95) C23.1
NetC24_1: C24.1 STM1.47 | length 109.3
  Component Side w10: STM1.47 5482.95,3397.95 v1(5500,3415)
  Bottom Layer w10: C24.1 5497,3418 v1(5500,3415)
NetD2_2: D2.2 R18.1 | length 73.1
  Component Side w10: D2.2 5311,2900 R18.1
NetD3_2: D3.2 R13.1 | length 70.7
  Component Side w10: D3.2 4060,3705 v1(4060,3725)
  Bottom Layer w10: R13.1 4050,3715 v1(4060,3725)
NetD4_2: D4.2 R19.1 | length 73.5
  Component Side w10: R19.1 5166,2899 D4.2
NetMP1_4: MP1.4 R1.2 R2.1 | length 227.3
  Component Side w10: MP1.4@4117.32,2807.6 4147.6,2807.6 4164,2824 4229,2824 4235,2830 v1(4235,2847)
  Bottom Layer w10: R1.2 4222,2860 ; v1(4235,2847) 4222,2860 ; R2.1 4222,2860
NetQ1_4: Q1.4 R6.1 | length 243.4
  Component Side w10: Q1.4 4385.59,3309.41 4410,3285 4410,3103 R6.1
NetQ2_4: Q2.4 R7.1 | length 240.1
  Component Side w10: Q2.4 4605.59,3309.41 4630,3285 R7.1
NetQ3_4: Q3.4 R9.1 | length 217.9
  Bottom Layer w10: Q3.4 4435,3225.59 4435,3120 R9.1
NetQ4_1: Q4.1 Q4.2 Q4.3 R12.2 U1.3 | length 81.6
  Bottom Layer w10: R12.2 4612,3394.95 U1.3
NetQ4_4: Q4.4 R10.1 | length 198.8
  Bottom Layer w10: Q4.4 4640,3240.59 4640,3106 R10.1
NetQ5_4: Q5.4 R8.1 | length 242.6
  Component Side w10: Q5.4 4165.59,3304.41 4185,3285 4185,3106 R8.1
NetQ6_1: Q6.1 Q6.2 Q6.3 R14.2 U2.3 | length 70.1
  Bottom Layer w10: R14.2@4167.6,3352.6 U2.3@4167.6,3422.68
NetQ6_4: Q6.4 R11.1 | length 193.9
  Bottom Layer w10: Q6.4 4170,3275 4195,3250 4195,3110 R11.1@4185,3100
NetR33_1: R33.1 STM1.60 | length 210.3
  Component Side w10: STM1.60 5141.1,3393.9 v1(5190,3345)
  Bottom Layer w10: R33.1 v1(5190,3345)
NRST: C22.2 R32.2 S1.1 STM1.7 | length 428.7
  Component Side w10: STM1.7 5014.53,3299.53 5025,3310 5025,3422.68 5007.68,3440 v1(4990,3440)
  Bottom Layer w10: R32.2 v1@4963,3563 ; v1(4990,3440) 4990,3446 4965,3471 v1(4965,3560) 4965,3561 v1@4963,3563 ; C22.2 4963,3565 v1@4963,3563
OSC1: C20.2 STM1.5 XT1.2 | length 241.5
  Component Side w10: XT1.2@4855,3400 v1(4910,3345) 4916.1,3338.9 STM1.5
  Bottom Layer w10: C20.2 4903,3345 v1(4910,3345)
OSC2: C21.2 STM1.6 XT1.1 | length 274.6
  Component Side w10: XT1.1@4855,3240 4855,3255 v1(4905,3305) 4919.21,3319.21 STM1.6
  Bottom Layer w10: C21.2 4847,3247 v1(4905,3305)
PGND: C3.1 C4.1 C5.1 C9.2 C13.2 C14.1 C15.1 C16.1 C26.2 C27.1 C29.2 D1.1 FD1.8 MP1.2 P2.1 P6.2 Q3.1 Q3.2 Q3.3 R2.2 R3.2 R12.1 R13.2 R14.1 R16.1 R22.2 R23.1 R26.1 R29.1 RT1.2 U1.2 U1.4 U2.2 U2.4 | length 44
  Component Side w10: v1(5270,3660) 5271.57,3660 P2.1
  other v1: 4260,2755 4375,2755 4490,2770 4925,2820 4490,2830 4785,2990 4735,3035 4005,3045 3985,3065 4930,3065 4815,3080 3975,3095 4695,3130 4730,3225 4230,3270 4700,3285 4805,3325 4835,3325 4230,3335 4685,3335 4465,3410 3975,3445 3945,3495 4505,3560 5175,3665
RXD: P5.3 STM1.54 | length 356.3
  Component Side w10: v1(5245,3445) 5259,3459 5259,3494.79 STM1.54
  Bottom Layer w10: v1(5245,3445) 5265,3425 5295,3425 5310,3440 5310,3515 5401.22,3606.22 P5.3
SLAVE_CSN: STM1.24
SLAVE_MISO: STM1.22
SLAVE_MOSI: STM1.23
SLAVE_SCK: STM1.21
SWCLK: P4.3 STM1.49 | length 288.1
  Component Side w10: STM1.49 5565,3495 5615,3445 P4.3@5615,3435
SWDIO: P4.2 STM1.46 | length 199.4
  Component Side w10: STM1.46 5576.73,3378.27 P4.2@5617.5,3337.5
TXD: P5.4 STM1.53 | length 238.4
  Component Side w10: STM1.53 5278.9,3456.1 v1(5280,3455)
  Bottom Layer w10: v1(5280,3455) 5280,3545 5352.01,3617.01 P5.4
V_ADC: R21.2 R22.1 STM1.8 | length 792.6
  Component Side w10: v1(4940,3265) 4954.84,3279.84 STM1.8
  Bottom Layer w10: R22.1@4670,3641 R21.2 ; R22.1 4785,3640 4825,3600 4825,3534.64 4874.64,3485 4922.07,3485 4958.37,3448.7 4958.37,3441.63 5020,3380 5020,3285 5000,3265 v1(4940,3265)
VIN: C4.2 C13.1 C29.1 D3.1 MP1.5 P6.1 Q1.5 Q1.6 Q1.7 Q1.8 Q2.5 Q2.6 Q2.7 Q2.8 Q5.5 Q5.6 Q5.7 Q5.8 R1.1 R21.1 | length 2598.8
  Component Side w10: D3.1 4092.15,3766 P6.1@4168.15,3690 ; C4.2 C4.2@4235.7,2889
  Component Side w20: MP1.5@4117.32,2845 4160,2845 C4.2@4204,2889 ; MP1.5 4113.89,2850 4083.89,2820 4083.89,2781.11 4110,2755 v1(4160,2755) ; C4.2 C4.2@4204,2889 ; v1(4216,2936) 4216,2901 C4.2@4204,2889
  Component Side w40: P6.1@4168.15,3710 4252.15,3794 4415,3794 4504,3705 4610,3705 ; C29.1 4610,3705 ; C13.1 4945,3705 4610,3705
  Bottom Layer w10: v1(4160,2755) 4166,2755 R1.1
  Bottom Layer w20: P6.1 4040,3570 4040,3110 4190,2960 4216,2960 v1(4216,2936) ; R21.1 4664,3765 C29.1
VREF: C9.1 C26.1 STM1.20 U1.5 U2.5 | length 1687.6
  Component Side w10: v1(4245,3545) 4305,3545 4369,3609 4534,3609 v1(4550,3625) ; v1(5042.5,3007.5) 5050,3000 5101.77,3000 5121.42,3019.64 STM1.20
  Bottom Layer w10: U2.5 4205,3547 C26.1 4245,3581 v1(4245,3545) ; v1(4550,3625) 4565,3610 4644,3610 C9.1 4655,3553 4655,3517 U1.5@4645,3507 ; C9.1@4681,3579 4730,3530 4790,3530 4810,3510 4810,3447.37 4766,3403.37 4766,3251.63 4852.63,3165 4985,3165 5042.5,3107.5 v1(5042.5,3007.5)
pads on no net: P2.0 P5.0 S1.0 STM1.1 STM1.2 STM1.3 STM1.4 STM1.11 STM1.17 STM1.25 STM1.26 STM1.27 STM1.28 STM1.29 STM1.30 STM1.33 STM1.37 STM1.38 STM1.39 STM1.50 STM1.51 STM1.52 STM1.59 STM1.61 STM1.62 U3.5

## Polygon pours and split planes (outlines as drawn)
PGND on Component Side "gnd_TOP" (solid, remove dead copper, pour order 20): 3705,3875 6120,3875 6135,3860 6100,3825 6100,2555 3730,2555 3720,2545
GND on Component Side "gnd_TOP" (solid, remove dead copper, pour order 18): 5056.31,3633.24 5706.31,3633.24 5706.31,3948.24 5761.31,4003.24 5766.31,3998.24 6251.31,3998.24 6251.31,2633.24 6101.31,2483.24 5916.31,2668.24 5051.31,2668.24 5051.31,3118.24 4991.31,3178.24 4871.31,3178.24 4871.31,3548.24 4891.31,3568.24 5061.31,3568.24
PGND on Bottom Layer "gnd_TOP" (solid, remove dead copper, pour order 22): 3680,3900 3695,3915 6160,3915 6160,2715 6065,2620 6040,2645 3715,2645
GND on Bottom Layer "gnd_TOP" (solid, remove dead copper, pour order 16): 5065,3635 5715,3635 5715,3950 5770,4005 5775,4000 6260,4000 6260,2635 6110,2485 5925,2670 5060,2670 5060,3120 5000,3180 4880,3180 4880,3550 4900,3570 5070,3570

## Keep-outs
Keep-Out Layer:
  lines w10: 3870,3625 cw(c3870,3585) 3910,3585 ; 3875,3625 3800,3625 cw(c3800,3665) 3760,3665 3760,3785 cw(c3800,3785) 3800,3825 5710,3825 5920,3825 cw(c5920,3785) 5960,3785 5960,3665 cw(c5920,3665) 5920,3625 5760,3625 ccw(c5760,3585) 5720,3585 5720,2965 ; 3910,3590 3910,2970 cw(c3870,2970) 3870,2930 3800,2930 ccw(c3800,2890) 3760,2890 3760,2770 ccw(c3800,2770) 3800,2730 5710,2730 5920,2730 ccw(c5920,2770) 5960,2770 5960,2890 ccw(c5920,2890) 5920,2930 5760,2930 cw(c5760,2970) 5720,2970

## Other copper
Component Side:
  rectangle net VIN: 4520,3400 4615,3455
  rectangle net VIN: 4300,3400 4395,3455
  rectangle net VIN: 4080,3405 4175,3460
  rectangle net A: 4080,3275 4145,3340
  rectangle net B: 4300,3280 4365,3340
  rectangle net C: 4520,3290 4590,3340
  rectangle net VIN: 4080,3435 4615,3495
  rectangle net VIN: 4130,3470 4205,3695
  pour cut-out: 3756.03,3830 4010,3830 3995,3815 3995,3610 3775,3610 3751.46,3633.54
  pour cut-out: 3751.03,2935 4005,2935 3990,2920 3990,2715 3770,2715 3746.46,2738.54
  pour cut-out: 5948.97,3610 5695,3610 5710,3625 5710,3830 5930,3830 5953.54,3806.46
  pour cut-out: 5953.97,2715 5700,2715 5715,2730 5715,2935 5935,2935 5958.54,2911.46
Bottom Layer:
  rectangle net NetQ4_1: 4520,3265 4585,3390
  rectangle net PGND: 4250,3310 4410,3385
  rectangle net NetQ6_1: 4085,3265 4145,3385
  rectangle net B: 4290,3145 4395,3245
  rectangle net A: 4065,3145 4175,3245
  rectangle net C: 4510,3145 4615,3245
  rectangle net PGND: 4385,3310 4475,3785
  pour cut-out: 3996.98,2720 3743.02,2720 3758.02,2735 3758.02,2940 3978.02,2940 4001.55,2916.46
  pour cut-out: 4002.96,3615.79 3748.99,3615.79 3763.99,3630.79 3763.99,3835.79 3983.99,3835.79 4007.53,3812.25
  pour cut-out: 5971.46,3615.79 5717.5,3615.79 5732.5,3630.79 5732.5,3835.79 5952.5,3835.79 5976.03,3812.25
  pour cut-out: 5949.22,2706.81 5695.25,2706.81 5710.25,2721.81 5710.25,2926.81 5930.25,2926.81 5953.78,2903.27

## Silkscreen, mask and mechanical layers (free items; w line width, h text height)
Top Overlay:
  text "-" at 4465,3670 h30 r180
  text "FOC Brushless Motor" at 4220,3565 h30
  text "G" at 5290,3545 h30
  text "MO" at 5330,3545 h30
  text "MI" at 5395,3545 h30
  text "CK" at 5455,3545 h30
  text "CS" at 5525,3545 h30
  text "5V" at 5595,3545 h30
  text "+" at 4045,3540 h30
  text "Driver V2.2" at 4320,3520 h30
  text "G" at 5580,3520 h30 r90
  text "CLK" at 5575,3405 h30 r90
  text "DIO" at 5575,3305 h30 r90
  text "3V3" at 5575,3190 h30 r90
  text "CANL" at 5545,3160 h30 r270
  text "CANH" at 5545,3030 h30 r270
Bottom Overlay:
  text "TX" at 5335,3540 h30
  text "RX" at 5400,3540 h30
  text "G" at 5465,3540 h30
  text "5V" at 5545,3540 h30
Top Solder:
  rectangle: 4080,3475 4615,3495
  rectangle: 4130,3490 4200,3630
Solder Side:
  rectangle: 4085,3305 4140,3385
  rectangle: 4300,3310 4395,3385
  rectangle: 4385,3310 4440,3760

## Dimensions
3877.95,3720.63 to 5846.46,3720.63 on Mechanical 13
5846.46,3720.63 to 5846.46,2825 on Mechanical 13

## Text inside footprints (layer, text, board x,y; h text height)
C13: Top Overlay "+" at 5040,3750 h30 r180
C29: Top Overlay "+" at 4695,3740 h30 r180
Q1: Top Overlay "·" at 4320.82,3295 h118.11 r90
Q2: Top Overlay "·" at 4540.82,3295 h118.11 r90
Q3: Bottom Overlay "·" at 4320.82,3305 h118.11 r90
Q4: Bottom Overlay "·" at 4540.82,3305 h118.11 r90
Q5: Top Overlay "·" at 4100.82,3295 h118.11 r90
Q6: Bottom Overlay "·" at 4100.82,3305 h118.11 r90